# EAGLE board pcb (EAGLE 9.7.0)
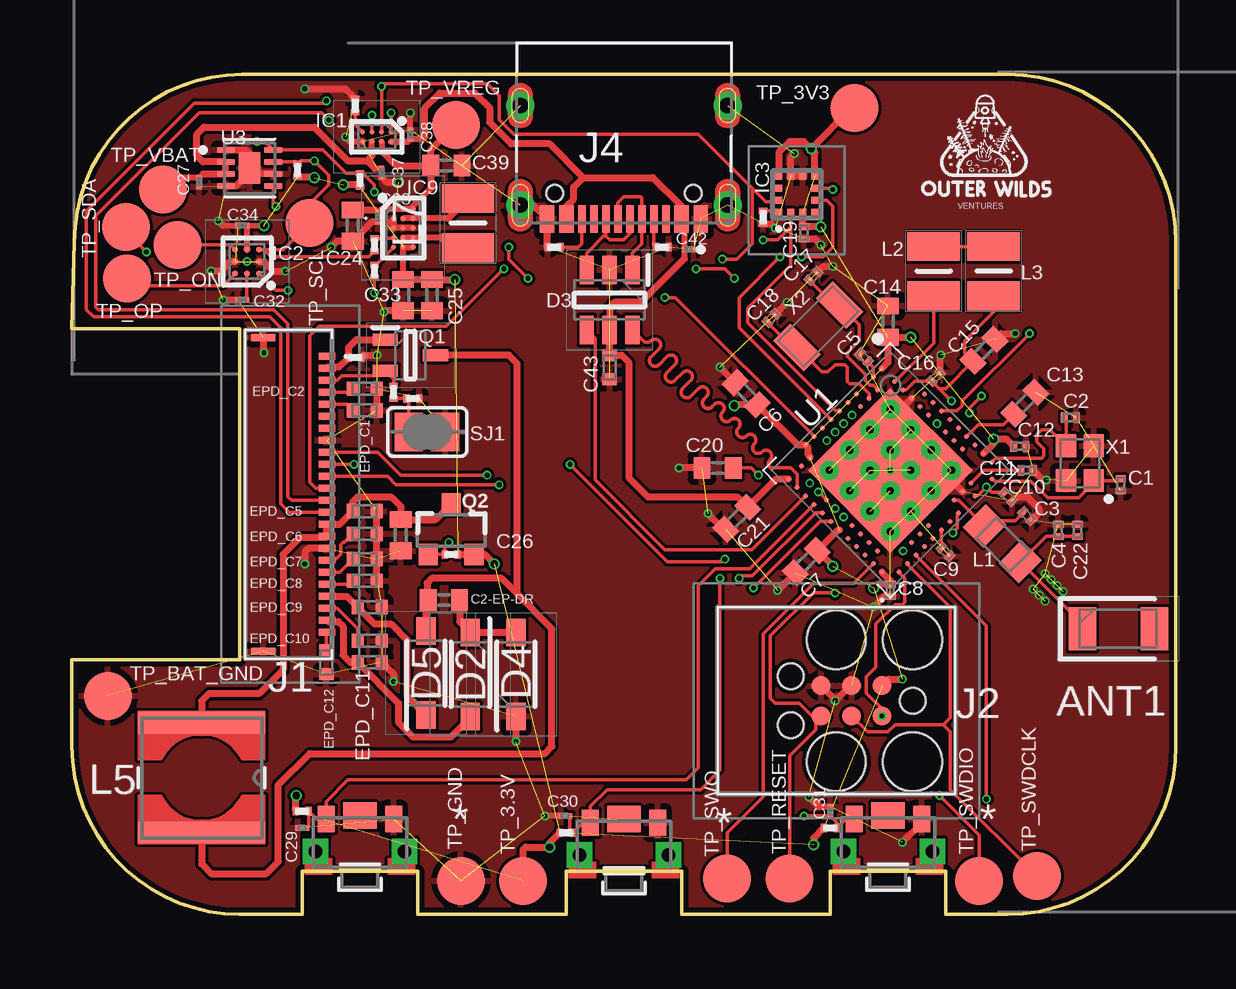
[diagram p0: board, top side]
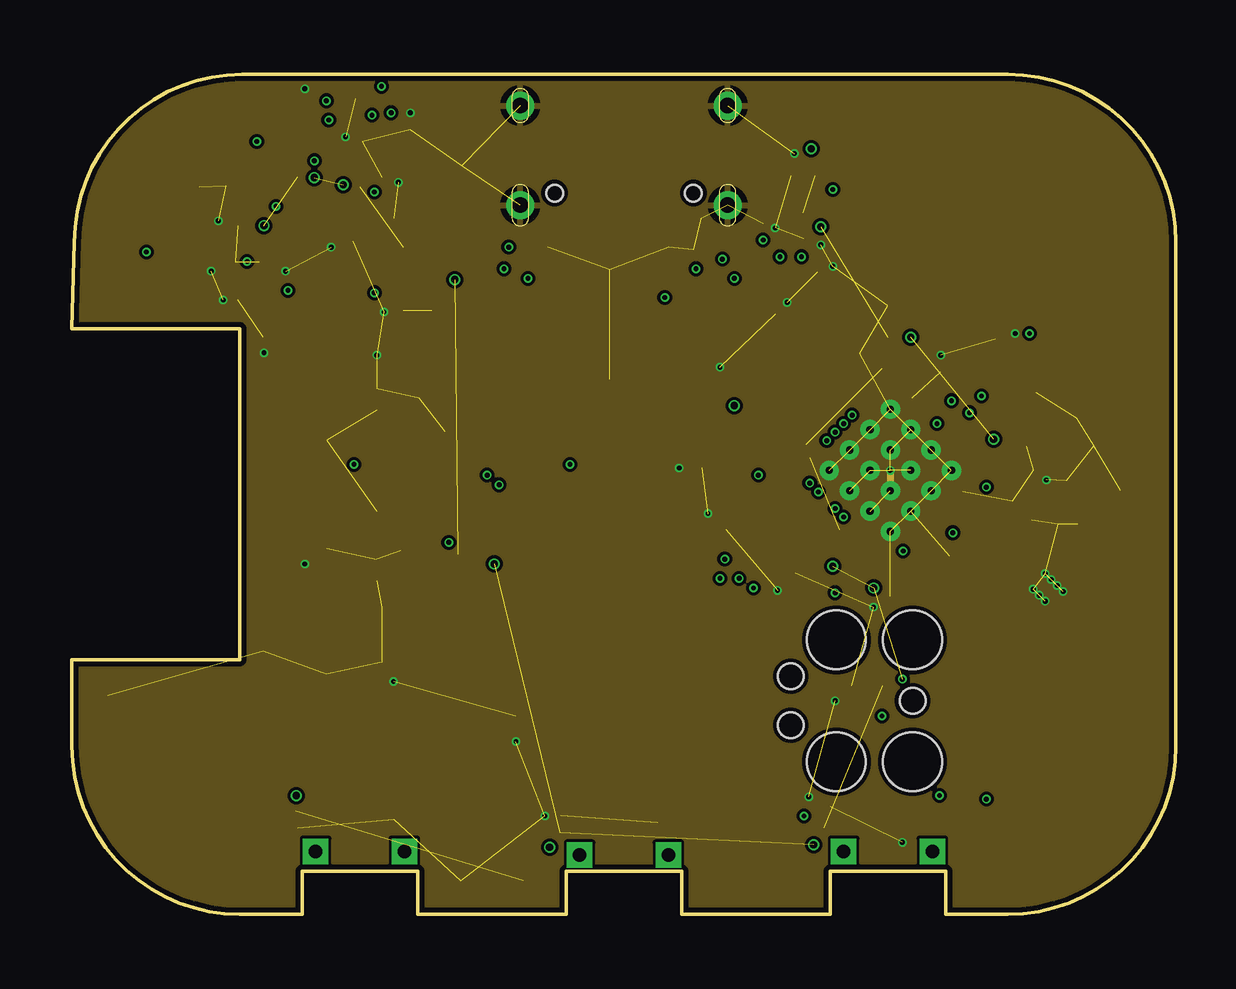
[diagram p1: board, inner layer Route2]
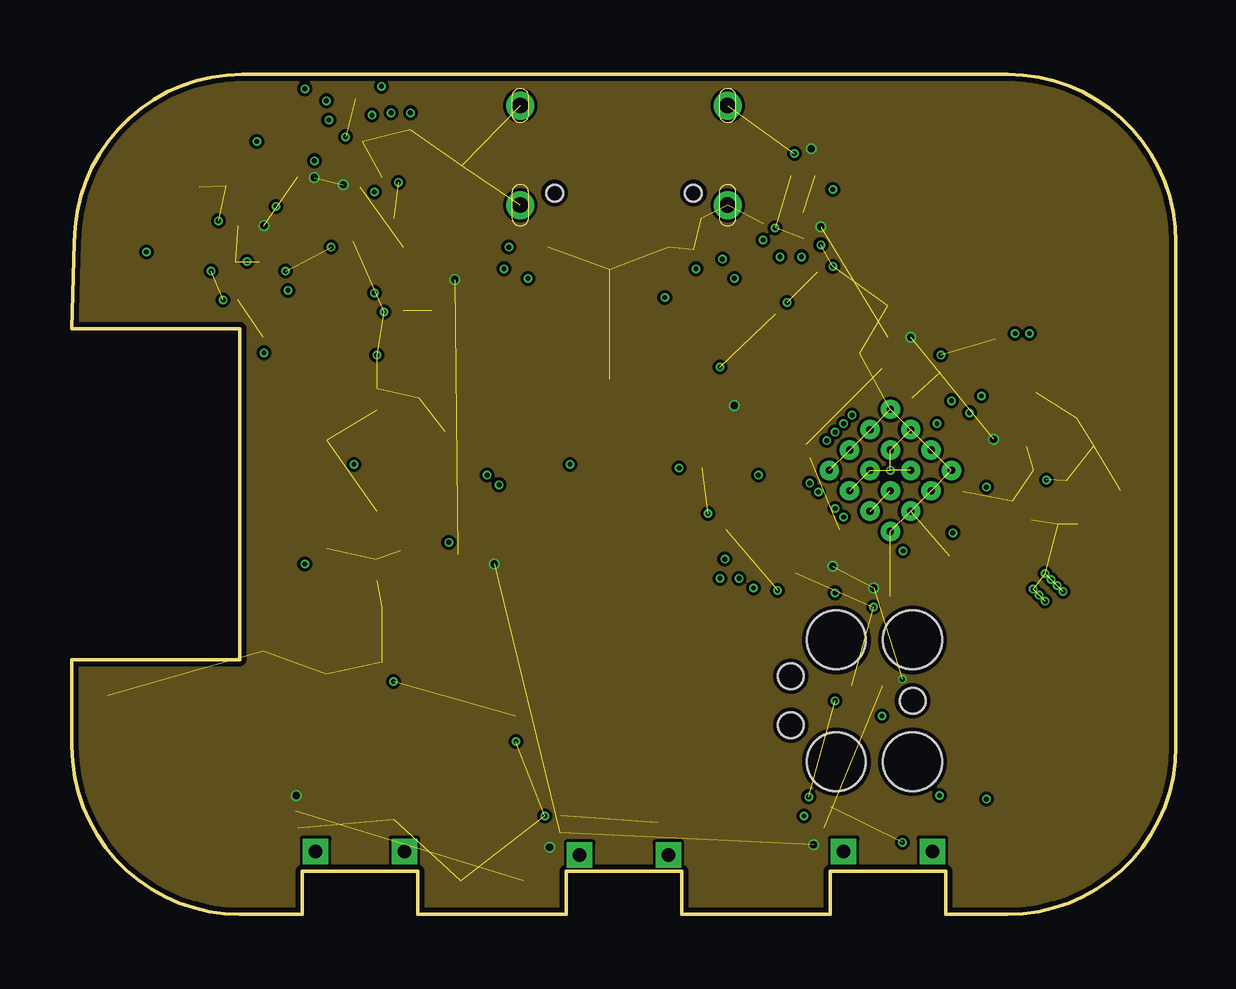
[diagram p2: board, inner layer Route15]
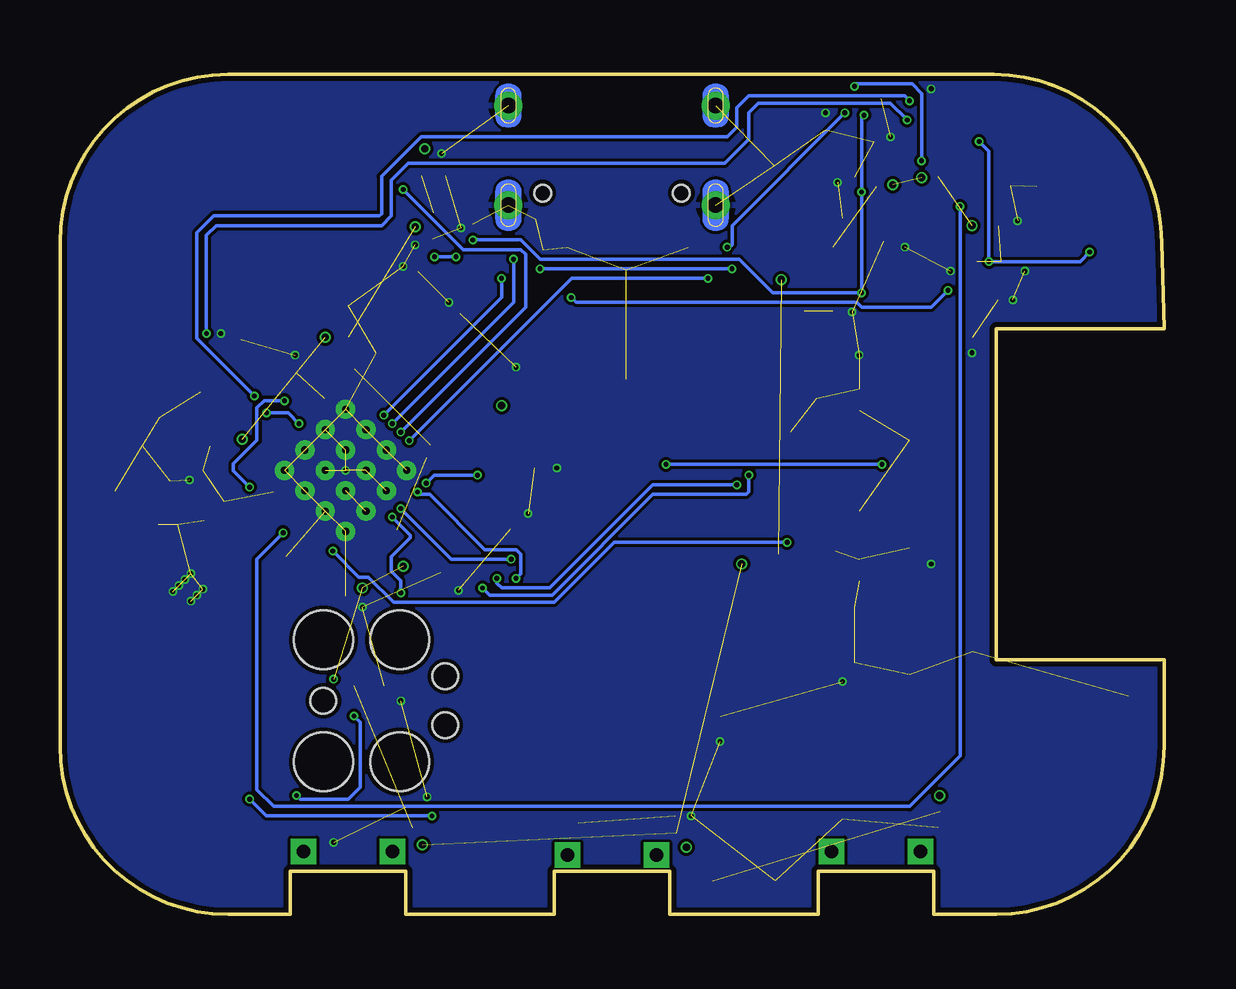
[diagram p3: board, bottom side, seen from below]

Size 46 x 35 mm. Coordinates in mm from the lower left corner, seen from the top.
Outline: 39,0 36.4,0 36.4,1.8 31.6,1.8 31.6,0 25.4,0 25.4,1.8 20.6,1.8 20.6,0 14.4,0 14.4,1.8 9.6,1.8 9.6,0 7,0 arc-90 0,7 0,10.6 7,10.6 7,24.4 0,24.4 0.1,28 arc-90 7.1,35 39,35 arc-90 46,28 46,7 arc-90 39,0
Copper layers (1+2*15+16): Top 0.035mm / dielectric 1.6mm / Route2 0.035mm / dielectric 0.15mm / Route15 0.035mm / dielectric 0.2mm / Bottom 0.035mm
Design rules "jlcpcb-2layers.dru *": minimum track width 5mil, minimum drill 0.2mm, track to track 5mil, track to pad 5mil, pad to pad 5mil, via to via 5mil, smd to smd 5mil, copper to edge 0.2mm, drill to drill 6mil, minimum pad ring 10mil, minimum via ring 3mil, stop-mask expansion 4mil, vias tented up to drill 999mm, thermal gap 10mil

## Footprints (pad centres in the part's own frame; a part is rotated, then mirrored left to right if it is on the bottom)
2450AT18B100E_ANTC3216X140N = smd 1.15 x 1.8: 1 -1.5,0; 2 1.5,0
NORDIC_NRF_3_RESC0201_L = smd 0.28 x 0.43: 1 -0.255,0; 2 0.255,0
ESP32_C6_LIBRARY_1_ESP32_WROVER_EAGLE-LTSPICE_C0402 = smd 0.7 x 0.9: 1 -0.65,0; 2 0.65,0
GRM011R60J152KE01L_2_CAPC0201X13N = smd 0.22 x 0.23: 1 -0.185,0; 2 0.185,0
NORDIC_NRF_3_RESC0402_L = smd 0.5 x 0.6: 1 -0.5,0; 2 0.5,0
ESP32_C6_LIBRARY_5_SOD3716X135N = smd 1.15 x 0.8: 1 -1.75,0; 2 1.75,0
ESP32_C6_LIBRARY_3_SOT95P280X145-6N = smd 1.2 x 0.6: 1 -1.25,0.95; 2 -1.25,0; 3 -1.25,-0.95; 4 1.25,-0.95; 5 1.25,0; 6 1.25,0.95
BQ25180YBGR_BGA8C40P2X4_100X155X50 = smd 0.2 x 0.2: A1 -0.2,0.6; A2 0.2,0.6; B1 -0.2,0.2; B2 0.2,0.2; C1 -0.2,-0.2; C2 0.2,-0.2; D1 -0.2,-0.6; D2 0.2,-0.6
DRV2605YZFR_BGA9C50P3X3_144X144X62 = smd 0.25 x 0.25: A1 -0.5,0.5; A2 0,0.5; A3 0.5,0.5; B1 -0.5,0; B2 0,0; B3 0.5,0; C1 -0.5,-0.5; C2 0,-0.5; C3 0.5,-0.5
BMA423_BMA423 = smd 0.3 x 0.35: 1 -0.75,-0.775; 2 -0.25,-0.775; 3 0.25,-0.775; 4 0.75,-0.775; 7 0.75,0.775; 8 0.25,0.775; 9 -0.25,0.775; 10 -0.75,0.775 | smd 0.35 x 0.3: 5 0.775,-0.25; 6 0.775,0.25; 11 -0.775,0.25; 12 -0.775,-0.25
RT6160AWSC_BGA15C40P3X5_140X230X60 = smd 0.216 x 0.216: A1 -0.4,0.8; A2 0,0.8; A3 0.4,0.8; B1 -0.4,0.4; B2 0,0.4; B3 0.4,0.4; C1 -0.4,0; C2 0,0; C3 0.4,0; D1 -0.4,-0.4; D2 0,-0.4; D3 0.4,-0.4; E1 -0.4,-0.8; E2 0,-0.8; E3 0.4,-0.8
503480-2400_5034802400 = smd 0.3 x 0.7: 1 -5.75,1.525; 2 -5.25,1.525; 3 -4.75,1.525; 4 -4.25,1.525; 5 -3.75,1.525; 6 -3.25,1.525; 7 -2.75,1.525; 8 -2.25,1.525; 9 -1.75,1.525; 10 -1.25,1.525; 11 -0.75,1.525; 12 -0.25,1.525; 13 0.25,1.525; 14 0.75,1.525; 15 1.25,1.525; 16 1.75,1.525; 17 2.25,1.525; 18 2.75,1.525; 19 3.25,1.525; 20 3.75,1.525; 21 4.25,1.525; 22 4.75,1.525; 23 5.25,1.525; 24 5.75,1.525 | smd 0.3 x 1: MP1 -6.54,-1.125; MP2 6.54,-1.125
TC2030-IDC_TC2030IDC = smd 0.783 x 0.783: 1 -0.953,-0.635; 2 -0.953,0.635; 3 0.317,-0.635; 4 0.317,0.635; 5 1.588,-0.635; 6 1.588,0.635 | hole 2.451: -2.223,-2.54; -2.223,2.54; 0.952,-2.54; 0.952,2.54 | hole 1.067: -2.223,0; 2.857,-1.016; 2.857,1.016
KH-TYPE-C-16P_KINGHELM_KH-TYPE-C-16P = smd 0.6 x 1.15: A1_B12 -3.2,4.725; A4_B9 -2.4,4.725; A9_B4 2.4,4.725; A12_B1 3.2,4.725 | smd 0.3 x 1.15: A5 -1.25,4.725; A6 -0.25,4.725; A7 0.25,4.725; A8 1.25,4.725; B5 1.75,4.725; B6 0.75,4.725; B7 -0.75,4.725; B8 -1.75,4.725 | drill 0.65 pad 1.05: SH1 -4.32,0; SH2 4.32,0; SH3 -4.32,4.15; SH4 4.32,4.15 | hole 0.7: -2.89,3.65; 2.89,3.65
NORDIC_NRF_2_RESC0805_N = smd 1.2 x 1.35: 1 -1.1,0; 2 1,0
MLP2016SR47MT0S1_INDC2016X100N = smd 1.2 x 2.2: 1 -1.028,0; 2 1.028,0
ESP32_C6_LIBRARY_2_IND_4828-WE-TPC_WRE = smd 0.9 x 5.3: 1 -2.286,0; 2 2.286,0
ESP32_C6_LIBRARY_6_SOT65P210X110-3N = smd 1.05 x 0.5: 1 -1.05,0.65; 2 -1.05,-0.65; 3 1.05,0
ESP32_C6_LIBRARY_4_ESP32_C6_LIBRARY_4_ESP32_C6_LIBRARY_4_ESP32_C6_LIBRARY_4_ESP32_WROVER_SPARKFUN-DISCRETESEMI_SOT23-3 = smd 0.8 x 0.9: 1 -0.95,-1; 2 0.95,-1; 3 0,1.1
CPF0201D7K68C1_0201 = smd 0.35 x 0.25: 1 0,0.275; 2 0,-0.275
ERA-1AEB3401C_0201 = smd 0.35 x 0.25: 1 0,0.275; 2 0,-0.275
ESP32_C6_LIBRARY_7_JUMPER_SJ = smd 1.168 x 1.6: 1 -0.762,0; 2 0.762,0
2025-10-22_07-23-44_LIBRARY_SW_EVP-AKE31A_PAN = smd 0.711 x 1.092: 1 -1.4,-0.972; 2 1.4,-0.972 | drill 0.559 pad 0.914 square: 3 -1.848,0.381; 4 1.848,0.381 | smd 1.397 x 1.092: 5 0,-1.124
HECTOR_WATCH_1_TP20R = smd 2 x 2: TP 0,0
NORDIC_NRF_4_AQFN50P700X700X85_HS-74N = smd 4.85 x 4.85: P$74 0,0 | drill 0.3 pad 0.6: P$75 -1.8,1.8; P$76 -0.6,1.8; P$77 0.6,1.8; P$78 1.8,1.8; P$79 -1.8,0.6; P$80 -0.6,0.6; P$81 0.6,0.6; P$82 1.8,0.6; P$83 -1.8,-0.6; P$84 -0.6,-0.6; P$85 0.6,-0.6; P$86 1.8,-0.6; P$87 -1.8,-1.8; P$88 -0.6,-1.8; P$89 0.6,-1.8; P$90 1.8,-1.8 | smd 0.2 x 0.2: P$A8 -1.25,3.25; P$A10 -0.75,3.25; P$A12 -0.25,3.25; P$A14 0.25,3.25; P$A16 0.75,3.25; P$A18 1.25,3.25; P$A20 1.75,3.25; P$A22 2.25,3.25; P$A23 2.75,3.25; P$AA24 3.25,-2.25; P$AB2 -2.75,-2.5; P$AC5 -2,-2.75; P$AC9 -1,-2.75; P$AC11 -0.5,-2.75; P$AC13 0,-2.75; P$AC15 0.5,-2.75; P$AC17 1,-2.75; P$AC19 1.5,-2.75; P$AC21 2,-2.75; P$AC24 3.25,-2.75; P$AD2 -2.75,-3.25; P$AD4 -2.25,-3.25; P$AD6 -1.75,-3.25; P$AD8 -1.25,-3.25; P$AD10 -0.75,-3.25; P$AD12 -0.25,-3.25; P$AD14 0.25,-3.25; P$AD16 0.75,-3.25; P$AD18 1.25,-3.25; P$AD20 1.75,-3.25; P$AD22 2.25,-3.25; P$AD23 2.75,-3.25; P$B1 -3.25,2.75; P$B3 -2.5,2.75; P$B5 -2,2.75; P$B7 -1.5,2.75; P$B9 -1,2.75; P$B11 -0.5,2.75; P$B13 0,2.75; P$B15 0.5,2.75; P$B17 1,2.75; P$B19 1.5,2.75; P$B24 3.25,2.75; P$C1 -3.25,2.25; P$D2 -2.75,2; P$D23 2.75,2; P$E24 3.25,1.75; P$F2 -2.75,1.5; P$F23 2.75,1.5; P$G1 -3.25,1.25; P$H2 -2.75,1; P$H23 2.75,1; P$J1 -3.25,0.75; P$J24 3.25,0.75; P$K2 -2.75,0.5; P$L1 -3.25,0.25; P$L24 3.25,0.25; P$M2 -2.75,0; P$N1 -3.25,-0.25; P$N24 3.25,-0.25; P$P2 -2.75,-0.5; P$P23 2.75,-0.5; P$R1 -3.25,-0.75; P$R24 3.25,-0.75; P$T2 -2.75,-1; P$T23 2.75,-1; P$U1 -3.25,-1.25; P$U24 3.25,-1.25; P$V23 2.75,-1.5; P$W1 -3.25,-1.75; P$W24 3.25,-1.75; P$Y2 -2.75,-2; P$Y23 2.75,-2
ESP32_C6_LIBRARY_SON50P200X200X80-9N = smd 0.76 x 0.27: 1 -0.985,0.75; 2 -0.985,0.25; 3 -0.985,-0.25; 4 -0.985,-0.75; 5 0.985,-0.75; 6 0.985,-0.25; 7 0.985,0.25; 8 0.985,0.75 | smd 0.9 x 1.3: 9 0,0
NORDIC_NRF_BT-XTAL_2016_N = smd 0.95 x 0.85: 1 -0.725,-0.575; 2 0.725,-0.575; 3 0.725,0.575; 4 -0.725,0.575
NORDIC_NRF_1_XTAL_3215_N = smd 1 x 1.8: 1 -1.25,0; 2 1.25,0

## Placement (x,y rotation side)
ANT1  2450AT18B100E  [2450AT18B100E_ANTC3216X140N]  43.6,11.9 0 top
C1  12pF  [NORDIC_NRF_3_RESC0201_L]  43.7,17.9 270 top
C2  12pF  [NORDIC_NRF_3_RESC0201_L]  41.6,20.7 0 top
C2-EP-DR  4.7uF/25V  [ESP32_C6_LIBRARY_1_ESP32_WROVER_EAGLE-LTSPICE_C0402]  15.5,13.1 180 top
C3  1pF  [NORDIC_NRF_3_RESC0201_L]  39.8,16.6 315 top
C4  1pF  [NORDIC_NRF_3_RESC0201_L]  41.1,16 90 top
C5  100nF  [NORDIC_NRF_3_RESC0201_L]  33,23.2 315 top
C6  4.7uF  [ESP32_C6_LIBRARY_1_ESP32_WROVER_EAGLE-LTSPICE_C0402]  28.1,21.7 135 top
C7  [ESP32_C6_LIBRARY_1_ESP32_WROVER_EAGLE-LTSPICE_C0402]  30.6,14.7 225 top
C8  [NORDIC_NRF_3_RESC0201_L]  34.1,13.5 270 top
C9  820pF N.C  [NORDIC_NRF_3_RESC0201_L]  36.4,15.1 315 top
C10  N.C.  [NORDIC_NRF_3_RESC0201_L]  39,17.4 315 top
C11  100pF  [NORDIC_NRF_3_RESC0201_L]  39.8,18.5 0 top
C12  100nF  [NORDIC_NRF_3_RESC0201_L]  39.5,19.5 0 top
C13  N.C.  [ESP32_C6_LIBRARY_1_ESP32_WROVER_EAGLE-LTSPICE_C0402]  39.7,21.3 45 top
C14  4.7uF  [ESP32_C6_LIBRARY_1_ESP32_WROVER_EAGLE-LTSPICE_C0402]  34,24.7 90 top
C15  1.0uF  [ESP32_C6_LIBRARY_1_ESP32_WROVER_EAGLE-LTSPICE_C0402]  38,23.5 45 top
C16  47nF  [NORDIC_NRF_3_RESC0201_L]  36,22.4 225 top
C17  12pF  [NORDIC_NRF_3_RESC0201_L]  30.9,26.6 225 top
C18  12pF  [NORDIC_NRF_3_RESC0201_L]  29.15,24.85 225 top
C19  100nF  [NORDIC_NRF_3_RESC0201_L]  30.5,28.4 270 top
C20  4.7uF  [ESP32_C6_LIBRARY_1_ESP32_WROVER_EAGLE-LTSPICE_C0402]  26.9,18.6 180 top
C21  [ESP32_C6_LIBRARY_1_ESP32_WROVER_EAGLE-LTSPICE_C0402]  27.7,16.5 225 top
C22  N.C.  [NORDIC_NRF_3_RESC0201_L]  41.9,16 90 top
C23  0.1uF  [GRM011R60J152KE01L_2_CAPC0201X13N]  12.75,29.05 90 top
C24  10uF  [ESP32_C6_LIBRARY_1_ESP32_WROVER_EAGLE-LTSPICE_C0402]  11.7,28.7 90 top
C25  22uF  [ESP32_C6_LIBRARY_1_ESP32_WROVER_EAGLE-LTSPICE_C0402]  15,25.8 270 top
C26  [ESP32_C6_LIBRARY_1_ESP32_WROVER_EAGLE-LTSPICE_C0402]  13.7,15.8 270 top
C27  0.1uF  [GRM011R60J152KE01L_2_CAPC0201X13N]  5.3,30.5 90 top
C29  1uF  [GRM011R60J152KE01L_2_CAPC0201X13N]  9.6,3.6 0 top
C30  1uF  [GRM011R60J152KE01L_2_CAPC0201X13N]  20.55,4.1 0 top
C31  1uF  [GRM011R60J152KE01L_2_CAPC0201X13N]  31.6,4.3 270 top
C32  1uF  [GRM011R60J152KE01L_2_CAPC0201X13N]  7.1,25.6 0 top
C33  22uF  [ESP32_C6_LIBRARY_1_ESP32_WROVER_EAGLE-LTSPICE_C0402]  13.8,25.8 270 top
C34  0.1uF  [GRM011R60J152KE01L_2_CAPC0201X13N]  7.1,28.7 0 top
C37  1uF  [GRM011R60J152KE01L_2_CAPC0201X13N]  12.9,30.9 90 top
C38  1uF  [GRM011R60J152KE01L_2_CAPC0201X13N]  14.1,32.5 270 top
C39  10uF  [ESP32_C6_LIBRARY_1_ESP32_WROVER_EAGLE-LTSPICE_C0402]  15.6,31.2 0 top
C42  0.1uF  [GRM011R60J152KE01L_2_CAPC0201X13N]  25.7,27.7 0 top
C43  4.7uF  [NORDIC_NRF_3_RESC0402_L]  22.4,22.8 270 top
D2  MBR0530  [ESP32_C6_LIBRARY_5_SOD3716X135N]  16.6,10 270 top
D3  USBLC6-2SC6Y  [ESP32_C6_LIBRARY_3_SOT95P280X145-6N]  22.4,25.6 270 top
D4  MBR0530  [ESP32_C6_LIBRARY_5_SOD3716X135N]  18.5,10 90 top
D5  MBR0530  [ESP32_C6_LIBRARY_5_SOD3716X135N]  14.75,10.05 90 top
EPD_C1  [NORDIC_NRF_3_RESC0402_L]  12.2,21 180 top
EPD_C2  [NORDIC_NRF_3_RESC0402_L]  12.2,21.9 180 top
EPD_C5  [NORDIC_NRF_3_RESC0402_L]  12.2,16.8 180 top
EPD_C6  [NORDIC_NRF_3_RESC0402_L]  12.2,15.85 180 top
EPD_C7  [NORDIC_NRF_3_RESC0402_L]  12.2,14.8 180 top
EPD_C8  [NORDIC_NRF_3_RESC0402_L]  12.2,13.9 180 top
EPD_C9  [NORDIC_NRF_3_RESC0402_L]  12.4,12.8 180 top
EPD_C10  [NORDIC_NRF_3_RESC0402_L]  12.4,11.4 180 top
EPD_C11  [NORDIC_NRF_3_RESC0402_L]  12.4,10.5 180 top
EPD_C12  [NORDIC_NRF_3_RESC0402_L]  10.6,10.5 90 top
IC1  BQ25180YBGR_BQ25180YBGR  [BQ25180YBGR_BGA8C40P2X4_100X155X50]  12.7,32.4 270 top
IC2  DRV2605YZFR  [DRV2605YZFR_BGA9C50P3X3_144X144X62]  7.3,27.2 180 top
IC3  BMA423_BMA423  [BMA423_BMA423]  30.2,30 0 top
IC9  RT6160AWSC_RT6160AWSC  [RT6160AWSC_BGA15C40P3X5_140X230X60]  13.8,28.6 0 top
J1  503480-2400_503480-2400  [503480-2400_5034802400]  9.1,17.5 270 top
J2  TC2030-IDC_TC2030-IDC  [TC2030-IDC_TC2030IDC]  32.8,8.9 180 top
J4  KH-TYPE-C-16P_KH-TYPE-C-16P  [KH-TYPE-C-16P_KINGHELM_KH-TYPE-C-16P]  23,33.7 180 top
L1  3.9nH  [NORDIC_NRF_2_RESC0805_N]  38.8,15.4 315 top
L2  10uH  [MLP2016SR47MT0S1_INDC2016X100N]  35.9,26.8 90 top
L3  15nH  [MLP2016SR47MT0S1_INDC2016X100N]  38.4,26.8 270 top
L5  68uH  [ESP32_C6_LIBRARY_2_IND_4828-WE-TPC_WRE]  5.4,5.7 270 top
L7  MLP2016SR47MT0S1_FTC252012SR47MBCA  [MLP2016SR47MT0S1_INDC2016X100N]  16.5,28.8 270 top
Q1  SI1308EDL-T1-GE3  [ESP32_C6_LIBRARY_6_SOT65P210X110-3N]  14.1,23.3 0 top
Q2  20V/4.2A/52mΩ/1.4W  [ESP32_C6_LIBRARY_4_ESP32_C6_LIBRARY_4_ESP32_C6_LIBRARY_4_ESP32_C6_LIBRARY_4_ESP32_WROVER_SPARKFUN-DISCRETESEMI_SOT23-3]  15.8,16 0 top
R1_EP_DR  0.47  [CPF0201D7K68C1_0201]  13.4,21.75 180 top
R1_USB  5k1  [ERA-1AEB3401C_0201]  24.6,27.8 270 top
R2  0  [CPF0201D7K68C1_0201]  12.6,26.8 0 top
R2_EP_DR  10k  [CPF0201D7K68C1_0201]  11.8,23.2 270 top
R2_USB  5k1  [ERA-1AEB3401C_0201]  20.1,27.8 270 top
R3  0  [CPF0201D7K68C1_0201]  28.8,29.05 0 top
R4  0  [CPF0201D7K68C1_0201]  12.6,27.9 0 top
R5  10k  [ERA-1AEB3401C_0201]  9.6,4.3 270 top
R7  10k  [ERA-1AEB3401C_0201]  31.6,3.6 270 top
R8  10k  [ERA-1AEB3401C_0201]  20.6,3.4 270 top
R9  10k  [CPF0201D7K68C1_0201]  11.8,33.7 0 top
R17  3k3  [CPF0201D7K68C1_0201]  9.4,31 180 top
R18  3k3  [CPF0201D7K68C1_0201]  12,30.6 180 top
R_PWR_EPD  10k  [CPF0201D7K68C1_0201]  15.8,15 90 top
R_TYPE_SEL  2.2  [CPF0201D7K68C1_0201]  14.2,21.5 270 top
SJ1  [ESP32_C6_LIBRARY_7_JUMPER_SJ]  14.8,20.1 180 top
SW_DN  2025-10-22_07-23-44_LIBRARY_EVP-AKE31ASW_EVP-AKE31A_PAN  [2025-10-22_07-23-44_LIBRARY_SW_EVP-AKE31A_PAN]  34,3 180 top
SW_ENT  2025-10-22_07-23-44_LIBRARY_EVP-AKE31ASW_EVP-AKE31A_PAN  [2025-10-22_07-23-44_LIBRARY_SW_EVP-AKE31A_PAN]  23,2.85 180 top
SW_UP  2025-10-22_07-23-44_LIBRARY_EVP-AKE31ASW_EVP-AKE31A_PAN  [2025-10-22_07-23-44_LIBRARY_SW_EVP-AKE31A_PAN]  12,3 180 top
TP_3.3V  HECTOR_WATCH_1_TPTP20R  [HECTOR_WATCH_1_TP20R]  18.8,1.4 0 top
TP_3V3  TP_3V3  [HECTOR_WATCH_1_TP20R]  32.6,33.6 0 top
TP_BAT_GND  HECTOR_WATCH_1_TPTP20R  [HECTOR_WATCH_1_TP20R]  1.5,9.1 0 top
TP_GND  HECTOR_WATCH_1_TPTP20R  [HECTOR_WATCH_1_TP20R]  16.2,1.4 0 top
TP_ON  HECTOR_WATCH_1_TPTP20R  [HECTOR_WATCH_1_TP20R]  4.4,27.9 0 top
TP_OP  HECTOR_WATCH_1_TPTP20R  [HECTOR_WATCH_1_TP20R]  2.3,26.5 0 top
TP_RESET  HECTOR_WATCH_1_TPTP20R  [HECTOR_WATCH_1_TP20R]  29.9,1.5 0 top
TP_SCL  [HECTOR_WATCH_1_TP20R]  9.9,28.8 0 top
TP_SDA  HECTOR_WATCH_1_TPTP20R  [HECTOR_WATCH_1_TP20R]  2.25,28.65 0 top
TP_SWDCLK  HECTOR_WATCH_1_TPTP20R  [HECTOR_WATCH_1_TP20R]  40.2,1.6 180 top
TP_SWDIO  HECTOR_WATCH_1_TPTP20R  [HECTOR_WATCH_1_TP20R]  37.8,1.4 0 top
TP_SWO  HECTOR_WATCH_1_TPTP20R  [HECTOR_WATCH_1_TP20R]  27.3,1.5 0 top
TP_VBAT  HECTOR_WATCH_1_TPTP20R  [HECTOR_WATCH_1_TP20R]  3.8,30.2 0 top
TP_VREG  HECTOR_WATCH_1_TPTP20R  [HECTOR_WATCH_1_TP20R]  16,32.9 0 top
U1  NRF52840_QF  [NORDIC_NRF_4_AQFN50P700X700X85_HS-74N]  34.1,18.5 315 top
U3  MAX17048G+T10  [ESP32_C6_LIBRARY_SON50P200X200X80-9N]  7.4,31.1 0 top
X1  [NORDIC_NRF_BT-XTAL_2016_N]  42,18.8 90 top
X2  32.768kHz  [NORDIC_NRF_1_XTAL_3215_N]  31.1,24.5 225 top

## Library data of the parts
ANT1 = InkTime_v5; ARROW_PART_NUMBER: 2450AT18B100E; ARROW_PRICE-STOCK: https://www.arrow.com/en/products/2450at18b100e/johanson-dielectrics?utm_currency=USD&region=nac; DESCRIPTION: Antennas 2.45GHz ANTENNA; HEIGHT: 1.4mm; MANUFACTURER_NAME: JOHANSON TECHNOLOGY; MANUFACTURER_PART_NUMBER: 2450AT18B100E; MOUSER_PART_NUMBER: 609-2450AT18B100E; MOUSER_PRICE-STOCK: https://www.mouser.co.uk/ProductDetail/Johanson-Technology/2450AT18B100E?qs=yCnrNFeXz%252Bh5MFsFIXGZGA%3D%3D
C1-C5 C8-C12 C16-C19 C22 C43 EPD_C1 EPD_C2 EPD_C5-EPD_C12 L1 R1_EP_DR R1_USB R2 R2_EP_DR R2_USB R3-R5 R7-R9 R17 R18 R_PWR_EPD R_TYPE_SEL SJ1 TP_3.3V TP_3V3 TP_BAT_GND TP_GND TP_ON TP_OP TP_RESET TP_SCL TP_SDA TP_SWDCLK TP_SWDIO TP_SWO TP_VBAT TP_VREG U1 X1 X2 = InkTime_v5
C2-EP-DR C6 C7 C13-C15 C20 C21 C24-C26 C33 C39 = InkTime_v5; SPICEMODEL: NONE; SPICEPREFIX: C
C23 C27 C29-C32 C34 C37 C38 C42 = InkTime_v5; AVAILABILITY: In Stock; CHECK_PRICES: https://www.snapeda.com/parts/GRM011R60J152KE01L/Murata/view-part/?ref=eda; DESCRIPTION: SMD Capacitor X5R(EIA) with Capacitance: 1500pF Tol. 10%. Rated Voltage: 6.3Vdc; MF: Murata; MP: GRM011R60J152KE01L; PACKAGE: 0201 Murata; PRICE: None; SNAPEDA_LINK: https://www.snapeda.com/parts/GRM011R60J152KE01L/Murata/view-part/?ref=snap
D2 D4 D5 = InkTime_v5; AVAILABILITY: In Stock; CHECK_PRICES: https://www.snapeda.com/parts/MBR0530/Onsemi/view-part/?ref=eda; DESCRIPTION: Diode Schottky 30 V 500mA Surface Mount SOD-123; MF: ON Semiconductor; MP: MBR0530; PACKAGE: SOD-123-2 ON Semiconductor; PRICE: None; PURCHASE-URL: https://www.snapeda.com/api/url_track_click_mouser/?unipart_id=179458&manufacturer=ON Semiconductor&part_name=MBR0530&search_term=None; SNAPEDA_LINK: https://www.snapeda.com/parts/MBR0530/Onsemi/view-part/?ref=snap
D3 = InkTime_v5; AVAILABILITY: In Stock; CHECK_PRICES: https://www.snapeda.com/parts/USBLC6-2SC6Y/STMicroelectronics/view-part/?ref=eda; DESCRIPTION: 17V Clamp 5A (8/20µs) Ipp Tvs Diode Surface Mount SOT-23-6; MF: STMicroelectronics; MP: USBLC6-2SC6Y; PACKAGE: SOT-23-6 STMicroelectronics; PRICE: None; SNAPEDA_LINK: https://www.snapeda.com/parts/USBLC6-2SC6Y/STMicroelectronics/view-part/?ref=snap
IC1 = InkTime_v5; ARROW_PART_NUMBER: BQ25180YBGR; ARROW_PRICE-STOCK: https://www.arrow.com/en/products/bq25180ybgr/texas-instruments?utm_currency=USD&region=nac; DESCRIPTION: Charger IC Lithium Ion/Polymer, Lithium Iron Phosphate 8-DSBGA (1.6x1.1); HEIGHT: 0.5mm; MANUFACTURER_NAME: Texas Instruments; MANUFACTURER_PART_NUMBER: BQ25180YBGR; MOUSER_PART_NUMBER: 595-BQ25180YBGR; MOUSER_PRICE-STOCK: https://www.mouser.co.uk/ProductDetail/Texas-Instruments/BQ25180YBGR?qs=doiCPypUmgEWjAK%252BJAX6Tw%3D%3D
IC2 = InkTime_v5; ARROW_PART_NUMBER: DRV2605YZFR; ARROW_PRICE-STOCK: https://www.arrow.com/en/products/drv2605yzfr/texas-instruments?region=nac; DESCRIPTION: Haptic Driver for ERM/LRA with Built-In Library and Smart Loop Architecture; HEIGHT: 0.625mm; MANUFACTURER_NAME: Texas Instruments; MANUFACTURER_PART_NUMBER: DRV2605YZFR
IC3 = InkTime_v5; ARROW_PART_NUMBER: BMA423; ARROW_PRICE-STOCK: https://www.arrow.com/en/products/bma423/bosch; DESCRIPTION: Accelerometers Triaxial low-g 12bit Acceleration Sensor; HEIGHT: 1mm; MANUFACTURER_NAME: BOSCH; MANUFACTURER_PART_NUMBER: BMA423; MOUSER_PART_NUMBER: 262-BMA423; MOUSER_PRICE-STOCK: https://www.mouser.co.uk/ProductDetail/Bosch-Sensortec/BMA423?qs=HXFqYaX1Q2xC%252BSgeGoX3mg%3D%3D
IC9 = InkTime_v5; DESCRIPTION: Buck-Boost Regulator Positive Output Step-Up/Step-Down I2C DC-DC Controller IC 15-WL-CSP (BSC) (1.4x2.3); HEIGHT: 0.6mm; MANUFACTURER_NAME: RICHTEK; MANUFACTURER_PART_NUMBER: RT6160AWSC; MOUSER_PART_NUMBER: 835-RT6160AWSC; MOUSER_PRICE-STOCK: https://www.mouser.co.uk/ProductDetail/Richtek/RT6160AWSC?qs=amGC7iS6iy%2FLd9PSoixZXQ%3D%3D
J1 = InkTime_v5; DESCRIPTION: FFC & FPC Connectors 0.5mm FPC RA SMT Dual Contact 24Ckt; HEIGHT: 1.87mm; MANUFACTURER_NAME: Molex; MANUFACTURER_PART_NUMBER: 503480-2400; MOUSER_PART_NUMBER: 538-503480-2400; MOUSER_PRICE-STOCK: https://www.mouser.co.uk/ProductDetail/Molex/503480-2400?qs=OAhjpuo3Vu7efIoxFh9AOw%3D%3D
J2 = InkTime_v5; DESCRIPTION: CABLE ADAPTER 6 POS; HEIGHT: 19mm; MANUFACTURER_NAME: Tag Connect; MANUFACTURER_PART_NUMBER: TC2030-IDC
J4 = InkTime_v5; AVAILABILITY: Not in stock; CHECK_PRICES: https://www.snapeda.com/parts/KH-TYPE-C-16P/Kinghelm/view-part/?ref=eda; MF: kinghelm; MP: KH-TYPE-C-16P; PACKAGE: None; PRICE: None; SNAPEDA_LINK: https://www.snapeda.com/parts/KH-TYPE-C-16P/Kinghelm/view-part/?ref=snap
L2 L3 L7 = InkTime_v5; DESCRIPTION: SMD / SMT Inductors (Coils), L=0.47?H, L x W x T :; HEIGHT: 1mm; JLCPCB: https://jlcpcb.com/partdetail/6763488-FTC252012SR47MBCA/C5832368; MANUFACTURER_NAME: TDK; MANUFACTURER_PART_NUMBER: FTC252012SR47MBCA
L5 = InkTime_v5; COPYRIGHT: Copyright (C) 2024 Ultra Librarian. All rights reserved.; MANUFACTURER_PART_NUMBER: 744043680; MFR_NAME: Wurth Electronics
Q1 = InkTime_v5; AVAILABILITY: In Stock; CHECK_PRICES: https://www.snapeda.com/parts/SI1308EDL-T1-GE3/Vishay+Siliconix/view-part/?ref=eda; DESCRIPTION: Si1308EDL-T1-GE3 N-channel MOSFET Transistor, 1.5 A, 30 V, 3-Pin SC-70 | Siliconix / Vishay SI1308EDL-T1-GE3; MF: Vishay Siliconix; MP: SI1308EDL-T1-GE3; PACKAGE: SOT-323 Vishay Semiconductor; PRICE: None; PURCHASE-URL: https://www.snapeda.com/api/url_track_click_mouser/?unipart_id=274603&manufacturer=Vishay Siliconix&part_name=SI1308EDL-T1-GE3&search_term=None; SNAPEDA_LINK: https://www.snapeda.com/parts/SI1308EDL-T1-GE3/Vishay+Siliconix/view-part/?ref=snap
Q2 = InkTime_v5; PROD_ID: TRAN-14388
SW_DN SW_ENT SW_UP = InkTime_v5; COPYRIGHT: Copyright (C) 2025 Ultra Librarian. All rights reserved.; DIGI-KEY_PART_NUMBER_1: P123437TR-ND; DIGI-KEY_PART_NUMBER_2: P123437CT-ND; DIGI-KEY_PART_NUMBER_3: P123437DKR-ND; MANUFACTURER_NAME: Panasonic; MANUFACTURER_PART_NUMBER: EVP-AKE31A
U3 = InkTime_v5; AVAILABILITY: In Stock; CHECK_PRICES: https://www.snapeda.com/parts/MAX17048G+T10/Analog+Devices/view-part/?ref=eda; DESCRIPTION: 3µA 1-Cell/2-Cell Fuel Gauge with ModelGauge; MF: Analog Devices; MP: MAX17048G+T10; PACKAGE: TDFN-8 Maxim; PRICE: None; PURCHASE-URL: https://www.snapeda.com/api/url_track_click_mouser/?unipart_id=329239&manufacturer=Analog Devices&part_name=MAX17048G+T10&search_term=None; SNAPEDA_LINK: https://www.snapeda.com/parts/MAX17048G+T10/Analog+Devices/view-part/?ref=snap

## Nets
3V3: C6.1 C7.1 C8.1 C12.1 C14.1 C19.1 C25.1 C33.1 C34.2 IC2.C2 IC3.3 IC3.7 IC3.10 IC9.E2 IC9.E3 J2.1 Q2.2 R5.2 R7.2 R8.2 R17.1 R18.1 R_PWR_EPD.2 TP_3.3V.TP TP_3V3.TP U1.P$A22 U1.P$AD14 U1.P$AD23 U1.P$B1 U1.P$W1 U1.P$Y2
ALERT: U1.P$J24 U3.5
D+: D3.4 U1.P$AD6
D-: D3.6 U1.P$AD4
DEC1: C5.2 U1.P$C1
DEC3: C11.1 U1.P$D23
DEC4_6: C10.1 C15.1 C16.2 L3.2 U1.P$B5 U1.P$E24
DN: D3.1 J4.A7 J4.B7
DP: D3.3 J4.A6 J4.B6
EPD_3V3: C26.1 EPD_C5.2 J1.15 J1.16 L5.1 Q2.3
EPD_BUSY: J1.9 U1.P$AD12
EPD_CS: J1.12 U1.P$K2
EPD_DC: J1.11 U1.P$AD10
EPD_RST: J1.10 U1.P$AC11
GDR: J1.2 Q1.1 R2_EP_DR.2
GND: C1.2 C2.2 C3.2 C4.2 C5.1 C6.2 C7.2 C8.2 C9.2 C10.2 C11.2 C12.2 C13.2 C14.2 C15.2 C16.1 C17.1 C18.1 C19.2 C20.2 C21.2 C22.2 C23.1 C24.1 C25.2 C26.2 C27.1 C29.1 C30.1 C31.1 C32.1 C33.2 C34.1 C37.1 C38.1 C39.2 C42.2 C43.2 D3.2 D4.1 EPD_C1.1 EPD_C2.1 EPD_C5.1 EPD_C6.1 EPD_C7.1 EPD_C8.1 EPD_C9.1 EPD_C10.1 EPD_C11.1 EPD_C12.1 IC1.D2 IC2.B1 IC2.B3 IC3.8 IC3.9 IC9.B1 IC9.C1 IC9.C2 IC9.C3 J1.8 J1.17 J1.MP1 J1.MP2 J2.3 J2.5 J4.A1_B12 J4.A12_B1 J4.SH1 J4.SH2 J4.SH3 J4.SH4 R1_USB.1 R2_EP_DR.1 R2_USB.2 R3.2 R9.1 R_TYPE_SEL.1 SJ1.1 SW_DN.1 SW_ENT.1 SW_UP.1 TP_BAT_GND.TP TP_GND.TP U1.P$74 U1.P$75 U1.P$76 U1.P$77 U1.P$78 U1.P$79 U1.P$80 U1.P$81 U1.P$82 U1.P$83 U1.P$84 U1.P$85 U1.P$86 U1.P$87 U1.P$88 U1.P$89 U1.P$90 U1.P$B7 U1.P$F23 U3.1 U3.4 U3.6 U3.9 X1.2 X1.4
HAPTIC_EN: IC2.A1 U1.P$U1
IMU_INT1: IC3.5 U1.P$N1
IMU_INT2: IC3.6 U1.P$P2
LX1: IC9.B2 IC9.B3 L7.1
LX2: IC9.D2 IC9.D3 L7.2
MOSI: J1.14 U1.P$B13
N$1: C2.1 U1.P$A23 X1.3
N$2: IC3.1 R3.1
N$3: C1.1 U1.P$B24 X1.1
N$4: C3.1 L1.1 U1.P$H23
N$5: IC1.D1 R9.2
N$6: L2.2 L3.1
N$7: L2.1 U1.P$B3
N$8: EPD_C2.2 J1.4
N$9: IC9.D1 R4.1
N$10: C13.1 U1.P$A18
N$11: C9.1 U1.P$N24
N$12: IC9.E1 R2.1
N$13: C2-EP-DR.2 D5.2 L5.2 Q1.3
N$14: C2-EP-DR.1 D2.1 D4.2
N$15: EPD_C1.2 J1.5
N$16: C32.2 IC2.A2
N$17: J4.A5 R1_USB.2
N$21: C20.1 U1.P$AC5
N$25: R1_EP_DR.1 R_TYPE_SEL.2 SJ1.2
N$30: J4.B5 R2_USB.1
N$32: EPD_C6.2 J1.18
N$33: EPD_C7.2 J1.19
N$34: EPD_C12.2 J1.24
N$36: EPD_C10.2 J1.22
N$38: EPD_C8.2 J1.20
OUT+: IC2.A3 TP_OP.TP
OUT-: IC2.C3 TP_ON.TP
P0.00: C17.2 U1.P$D2 X2.1
P0.01: C18.2 U1.P$F2 X2.2
P0.04: U1.P$J1
P0.09: U1.P$L24
P0.13: C29.2 R5.1 SW_UP.2 U1.P$AD8
P0.14: C30.2 R8.1 SW_ENT.2 U1.P$AC9
P0.19: U1.P$AC15
P0.20: U1.P$AD16
P0.21: U1.P$AC17
P0.22: U1.P$AD18
P0.23: U1.P$AC19
P0.24: U1.P$AD20
P0.25: U1.P$AC21
P0.26: U1.P$G1
P0.27: U1.P$H2
P0.28: U1.P$B11
P0.29: U1.P$A10
P0.30: U1.P$B9
P0.31: U1.P$A8
P1.01: Q2.1 R_PWR_EPD.1 U1.P$Y23
P1.02: C31.2 R7.1 SW_DN.2 U1.P$W24
P1.03: U1.P$V23
P1.04: U1.P$U24
P1.05: U1.P$T23
P1.06: U1.P$R24
P1.07: U1.P$P23
P1.09: U1.P$R1
P1.10: U1.P$A20
P1.11: U1.P$B19
P1.12: U1.P$B17
P1.13: U1.P$A16
P1.14: U1.P$B15
P1.15: U1.P$A14
PMIC_INT: IC1.A1 U1.P$T2
PREVGH: D5.1 EPD_C9.2 J1.21
PREVGL: D2.2 EPD_C11.2 J1.23
RESE: J1.3 Q1.2 R1_EP_DR.2
RESET: J2.6 TP_RESET.TP U1.P$AC13
RF: ANT1.1 C4.1 C22.1 L1.2
SCK: J1.13 U1.P$A12
SCL: IC1.B1 IC2.C1 IC3.12 R4.2 R17.2 TP_SCL.TP U1.P$M2 U3.7
SDA: IC1.C1 IC2.B2 IC3.2 R2.2 R18.2 TP_SDA.TP U1.P$L1 U3.8
SWDCLK: J2.4 TP_SWDCLK.TP U1.P$AA24
SWDIO: J2.2 TP_SWDIO.TP U1.P$AC24
SWO: TP_SWO.TP U1.P$AD22
VBAT: C27.2 C37.2 IC1.C2 TP_VBAT.TP U3.2 U3.3
VBUS: C21.1 C38.2 C42.1 C43.1 D3.5 IC1.A2 J4.A4_B9 J4.A9_B4 U1.P$AD2
VREG: C23.2 C24.2 C39.1 IC1.B2 IC9.A1 IC9.A2 IC9.A3 TP_VREG.TP

## Tracks (layer width: path | path; a pad name or v marks a point on that pad's centre or on a via)
3V3  (via drill 0.2, 0.3)  (15 unrouted)
  Top 0.23: v8,28.7 C34.2
  Top 0.25: C34.2 7.29,27.71
  Top 0.26: C33.1 IC9.E2 IC9.E3
  Top 0.3: C33.1 C25.1 v15.95,26.45 | 7.29,27.71 IC2.C2 | U1.P$AD14 31.93,16.02 C7.1 31.7,14.52 v31.7,14.5 | R_PWR_EPD.2 Q2.2 17.2,15 v17.6,14.6 | R8.2 19.9,2.97 v19.9,2.8 18.9,2.8 18.8,2.7 TP_3.3V.TP | R5.2 9.32,4.93 v9.35,4.95 | IC3.7 30.95,31.75 v30.8,31.9 | v30.8,31.9 32.5,33.6 TP_3V3.TP | v30.8,31.9 30.5,32.2 29.9,32.2 29.45,31.75 IC3.10 | R7.2 30.9,3.18 v30.9,2.9 | C12.1 38.95,19.8 v38.4,19.8 38.4,19.62 U1.P$A22 | v34.95,24.05 C14.1 34,23 U1.P$B1 | v27.6,21.2 27.64,21.24 C6.1 30.24,19.56 U1.P$W1 30.66,19.46 30.66,19.16 30.74,19.08 U1.P$Y2 | v33.4,13.6 33.55,13.75 C8.1 34.1,13.9 U1.P$AD23 | v31.2,28.65 v31.2,28.66 C19.1 30.45,28.7 IC3.3 | R17.1 10.07,30.73 v10.1,30.7 | R18.1 11.93,30.4 v11.3,30.4 | J2.1 34.02,9.8 v34.6,9.8
  pour Route15: -0.07,-10.82 55.97,-10.82 62.22,-4.57 62.22,41.12 -10.17,41.12 -10.62,40.67 -10.62,-0.27
ALERT  (via drill 0.2)
  Top 0.152: U3.5 8.38,29.62 v8.5,29.5 | v36.7,15.9 36.88,16.08 36.88,16.68 U1.P$J24
  Bottom 0.152: v8.5,29.5 8.5,6.6 10.6,4.5 37.1,4.5 37.8,5.2 37.8,14.8 v36.7,15.9
D+
  Top 0.15: D3.4 21.8,24 21.8,18.1 24.7,15.2 28.32,15.2 U1.P$AD6
D-
  Top 0.15: 23.4,24.3 D3.6 23.8,23.9 arc90 24.13,23.9 arc-90 24.46,23.9 arc-90 24.46,23.57 24.13,23.24 arc90 24.13,22.91 arc90 24.46,22.91 24.79,23.24 arc-90 25.12,23.24 arc-90 25.12,22.91 24.79,22.58 arc90 24.79,22.25 arc90 25.12,22.25 25.45,22.58 arc-90 25.78,22.58 arc-90 25.78,22.25 25.45,21.92 arc90 25.45,21.59 arc90 25.78,21.59 26.11,21.92 arc-90 26.45,21.92 arc-90 26.45,21.59 26.34,21.48 arc90 26.34,21.15 arc90 26.67,21.15 26.77,21.25 arc-90 27.11,21.25 arc-90 27.11,20.93 arc90 27.11,20.59 arc90 27.44,20.59 arc-90 27.77,20.59 arc-90 27.77,20.26 arc90 27.77,19.93 arc90 28.1,19.93 arc-90 28.43,19.93 arc-90 28.43,19.6 arc90 28.43,19.27 arc90 28.76,19.27 arc-90 29.09,19.27 arc-90 29.09,18.94 arc90 29.09,18.61 29.1,18.6 29.95,18.6 30.21,18.34 U1.P$AD4
DEC1
  Top 0.152: C5.2 33.39,22.81 U1.P$C1
DEC3
  Top 0.152: C11.1 37.99,18.5 U1.P$D23
DEC4_6  (via drill 0.2)
  Top 0.15: U1.P$E24 37.74,17.44 v38.1,17.8 38.32,17.58 C10.1
  Top 0.152: 36.14,21.9 36.4,21.9 C15.1 37.2,23.38 37.2,23.9 38.4,25.1 L3.2 | 36.14,21.9 C16.2 35.12,22.22 34.76,21.86 U1.P$B5 | 36.14,21.9 36.64,21.4 v36.65,21.4
  Bottom 0.15: 38.77,18.77 38.77,18.48 v38.1,17.8
  Bottom 0.152: v36.65,21.4 37.5,21.4 37.8,21.1 37.8,19.75 38.77,18.77
DN
  Top 0.15: J4.A7 22.75,29.65 23,29.9 23.7,29.9 23.75,29.85 J4.B7 23.75,27.95 23.35,27.55 D3.1
DP
  Top 0.15: J4.A6 23.25,28.35 23,28.1 22.4,28.1 22.25,28.25 J4.B6 22.25,28.35 21.45,27.55 D3.3
EPD_3V3
  Top 0.3: L5.1 5.4,8.9 5.7,9.2 7.8,9.2 8.8,10.2 8.8,15 9.5,15.7 10.57,15.7 J1.16 J1.15 11.15,16.25 EPD_C5.2 11.7,17.2 11.9,17.4 13.3,17.4 13.7,17 C26.1 15.15,16.45 Q2.3
EPD_BUSY  (via drill 0.2)
  Top 0.15: J1.9 12.75,19.25 13.7,18.3 v17.3,18.3 | v28.4,13.6 31.18,16.38 U1.P$AD12
  Bottom 0.15: v17.3,18.3 17.3,17.6 17.4,17.5 21.3,17.5 25.5,13.3 28.1,13.3 v28.4,13.6
EPD_CS  (via drill 0.2)
  Top 0.15: J1.12 10.15,17.75 9.9,18 9.9,24.1 10.3,24.5 15.6,24.5 v18,26.9 | v27.6,26.5 27.2,26.9 v26,26.9
  Bottom 0.15: v18,26.9 v26,26.9 | v27.6,26.5 27.6,25.71 U1.P$K2
  other vias: 32.51,20.8
EPD_DC  (via drill 0.2)
  Top 0.15: J1.11 13.15,18.25 13.5,17.9 v17.8,17.9 | v27.8,14 27.9,14.1 28.35,14.1 30.98,16.73 U1.P$AD10
  Bottom 0.15: v17.8,17.9 21.3,17.9 25.6,13.6 27.6,13.6 27.8,13.8 v27.8,14
EPD_RST  (via drill 0.2)
  Top 0.15: v20.75,18.75 24.8,14.7 27.1,14.7 v27.2,14.8 | J1.10 v11.75,18.75
  Bottom 0.15: v11.75,18.75 v20.75,18.75 | v27.2,14.8 29.69,14.8 U1.P$AC11
  other vias: 31.8,16.91
GDR
  Top 0.3: J1.2 10.68,22.8 11.12,22.8 R2_EP_DR.2 11.53,23.62 11.85,23.95 Q1.1
GND  (via drill 0.2)  (94 unrouted)
  Top 0.23: C34.1 6.3,28.7 | C37.1 13.12,30.5
  Top 0.24: 13.34,28.87 C23.1 12.52,28.87 | C38.1 v14.1,33.4
  Top 0.26: IC9.C3 IC9.C2 IC9.C1 | 13.4,28.8 IC9.B1 | C30.1 v19.7,4.1 | C32.1 v6.3,25.6 | IC1.D2 11.6,32.2 | C31.1 31.12,4.48
  Top 0.3: U3.6 7.65,30.85 7.5,31 | 7.5,31 U3.9 7.4,31.7 7.25,31.85 U3.1 | U3.4 6.85,30.35 7.5,31 | IC9.C1 13.4,28.8 13.34,28.87 | U1.P$F23 36.65,18.08 U1.P$78 | C10.2 39.36,17.4 39.8,17.4 40.3,16.9 40.3,16.74 C3.2 | EPD_C8.1 EPD_C7.1 EPD_C6.1 EPD_C5.1 | J1.17 9.85,15.25 9.7,15.1 v9.7,14.6 | D4.1 v18.5,7.2 | R2_EP_DR.1 12.18,23.3 v12.7,23.3 | C33.2 13.05,25.15 v13,25.1 | J1.MP1 7.97,23.43 v8,23.4 | IC2.B3 6.6,27.2 6.2,26.8 v5.8,26.8 | IC2.B1 8,27.2 8.4,26.8 v8.9,26.8 | 12.52,28.87 C24.1 11.05,28.05 v10.8,27.8 | 6.3,28.7 v6.1,28.9 | R9.1 11.4,34.38 9.72,34.38 v9.7,34.4 | 11.6,32.2 v11.4,32.4 | 13.12,30.5 v13.6,30.5 | J2.5 31.8,8.95 v31.8,8.9 32.44,9.54 J2.3 | 31.12,4.48 v30.7,4.9 | SW_DN.1 35.4,3.8 v34.6,3 | C7.2 v29.4,13.5 | v29.4,13.5 | C21.2 27.16,16.04 v26.5,16.7 | C20.2 v25.3,18.6 | C6.2 v27,22.8 | v27,22.8 | C18.1 v29.8,25.5 | C17.1 31.3,27 v31.7,27 | C19.2 30.95,28.14 v31.2,27.9 | U1.P$B7 34.52,21.05 U1.P$75 | C16.1 36.18,23.28 v36.2,23.3 | C15.2 38.7,24.2 v39.3,24.2 | C8.2 33.84,13.25 v33.4,12.8 | EPD_C11.1 13.4,10 v13.4,9.7 | R3.2 29.12,28.77 v29.3,28.6 | IC3.8 IC3.9 29.95,31.55 v30.1,31.7 | R2_USB.2 19.8,27.82 J4.A12_B1 19.23,29.55 J4.SH4 | C11.2 40.45,18.1 v40.6,18.1 | EPD_C2.1 EPD_C1.1
  Route2 0.3: U1.P$74 U1.P$85
  other vias: 34.1,18.5 40.05,13.55 40.3,13.3 40.55,13.05 41.3,13.45 41.05,13.7 40.8,13.95 40.55,14.2
  pour Route2: -8.47,-8.32 50.27,-8.32 53.32,-5.27 53.32,35.22 -9.87,35.22 -11.42,33.67 -11.42,-5.37
  pour Bottom: 31.56,1.86 31.58,1.88 36.42,1.88 36.44,1.86 36.46,1.84 36.48,1.82 36.48,0.08 39,0.08 39.78,0.12 40.54,0.25 41.29,0.46 42,0.76 42.68,1.14 43.32,1.59 43.9,2.1 44.41,2.68 44.86,3.32 45.24,4 45.54,4.71 45.75,5.46 45.88,6.22 45.92,7 45.92,28 45.88,28.78 45.75,29.54 45.54,30.29 45.24,31 44.86,31.68 44.41,32.32 43.9,32.9 43.32,33.41 42.68,33.86 42,34.24 41.29,34.54 40.54,34.75 39.78,34.88 39,34.92 7.1,34.92 6.32,34.88 5.56,34.75 4.81,34.54 4.1,34.24 3.42,33.86 2.78,33.41 2.2,32.9 1.69,32.32 1.24,31.68 0.86,31 0.56,30.29 0.35,29.54 0.22,28.78 0.18,28 0.08,24.48 7.02,24.48 7.04,24.46 7.06,24.44 7.08,24.42 7.08,10.58 7.06,10.56 7.04,10.54 7.02,10.52 0.08,10.52 0.08,7 0.12,6.22 0.25,5.46 0.46,4.71 0.76,4 1.14,3.32 1.59,2.68 2.1,2.1 2.68,1.59 3.32,1.14 4,0.76 4.71,0.46 5.46,0.25 6.22,0.12 7,0.08 9.52,0.08 9.52,1.82 9.54,1.84 9.56,1.86 9.58,1.88 14.42,1.88 14.44,1.86 14.46,1.84 14.48,1.82 14.48,0.08 20.52,0.08 20.52,1.82 20.54,1.84 20.56,1.86 20.58,1.88 25.42,1.88 25.44,1.86 25.46,1.84 25.48,1.82 25.48,0.08 31.52,0.08 31.52,1.82 31.54,1.84
  pour Top: -5.57,-6.52 46.12,-6.52 46.12,30.67 42.07,34.72 -3.57,34.72 -5.92,32.37 -5.92,-6.17
HAPTIC_EN  (via drill 0.2)
  Top 0.15: IC2.A1 8.5,26 v9,26 | v24.7,25.7 25.13,25.7 U1.P$U1
  Bottom 0.15: v9,26 9.7,25.3 12.6,25.3 12.8,25.5 24.5,25.5 v24.7,25.7
IMU_INT1  (via drill 0.2)
  Top 0.15: IC3.5 31.45,29.75 31.7,29.5 31.7,27.8 31.3,27.4 v30.4,27.4 | v29.5,27.4 27.8,25.7 27.8,24.45 U1.P$N1
  Bottom 0.15: v30.4,27.4 v29.5,27.4
IMU_INT2  (via drill 0.2)
  Top 0.15: IC3.6 31.65,30.25 v31.7,30.2
  Bottom 0.15: v31.7,30.2 29.2,27.7 26.8,27.7 26.6,27.5 26.6,25.3 U1.P$P2
  other vias: 31.8,20.09
LX1
  Top 0.26: IC9.B2 IC9.B3 15.67,29
  Top 0.3: L7.1 15.67,29
LX2
  Top 0.26: IC9.D2 IC9.D3 15.4,28.2
  Top 0.3: L7.2 15.83,27.77 15.4,28.2
MOSI  (via drill 0.2)
  Top 0.152: J1.14 9.05,16.75 8.7,17.1 8.7,24.45 8.25,24.9 0.9,24.9 0.6,25.2 0.6,29.3 5.1,33.8 10.5,33.8 v10.6,33.9 | v37.9,21.6 37.4,21.1 v37.4,20.9
  Bottom 0.152: v10.6,33.9 10.8,34.1 17.3,34.1 17.8,33.6 17.8,32.8 18.2,32.4 30.95,32.4 32.6,30.75 32.6,29.2 32.7,29.1 39.6,29.1 40.3,28.4 40.3,24 v37.9,21.6 | v37.4,20.9 36.5,20.9 U1.P$B13
  other vias: 36.04,20.44
N$1
  Top 0.152: U1.P$A23 38.49,19 40.4,19 40.5,19.1 40.5,19.4 40.2,19.7 40.2,20 40.4,20.2 40.75,20.2 X1.3 41.42,20.62 C2.1
N$2
  Top 0.152: IC3.1 29.35,29.32 R3.1
N$3
  Top 0.152: C1.1 43.62,18.07 X1.1 42.58,17.98 41.95,17.35 40.65,17.35 39.95,18.05 38.44,18.05 U1.P$B24
N$4
  Top 0.152: U1.P$H23 36.75,17.25 36.95,17.25 L1.1 38.31,16.4 39.3,16.4 39.62,16.72 C3.1
N$5
  Top 0.15: R9.2 11.8,32.9 IC1.D1
N$6
  Top 0.152: L3.1 L2.2
N$7
  Top 0.152: L2.1 35.9,23.8 34.31,22.21 U1.P$B3
N$8
  Top 0.15: J1.4 11.55,21.75 EPD_C2.2
N$9
  Top 0.15: R4.1 13.38,28.18 IC9.D1
N$10
  Top 0.152: C13.1 38.8,20.4 37.77,20.4 U1.P$A18
N$11
  Top 0.15: C9.1 U1.P$N24
N$12
  Top 0.15: R2.1 12.68,27.07 IC9.E1
N$13
  Top 0.15: 14.75,13 14.82,13.07 C2-EP-DR.2
  Top 0.3: L5.2 5.4,2.1 5.8,1.7 8.1,1.7 8.6,2.2 8.6,5.4 9.9,6.7 19.7,6.7 20,7 20,11.9 18.55,13.35 | 18.55,13.35 17.9,14 15,14 14.8,13.8 14.8,13.1 14.82,13.07 | C2-EP-DR.2 14.75,13 D5.2 | 18.55,13.35 18.55,22.95 18.2,23.3 Q1.3
N$14
  Top 0.3: C2-EP-DR.1 16.15,12.2 D2.1 D4.2
N$15
  Top 0.15: J1.5 11.45,21.25 EPD_C1.2
N$16
  Top 0.15: C32.2 7.29,26.69 IC2.A2
N$17
  Top 0.15: R1_USB.2 24.25,27.88 J4.A5
N$21  (via drill 0.2)
  Top 0.152: C20.1 28.3,18.6 v28.6,18.3
  Bottom 0.152: v28.6,18.3 30.41,18.3 U1.P$AC5
  other vias: 30.74,17.97
N$25
  Top 0.15: R1_EP_DR.1 13.43,21.5 R_TYPE_SEL.2 14.04,21.39 SJ1.2
N$30
  Top 0.15: R2_USB.1 21.1,27.8 21.25,27.95 J4.B5
N$32
  Top 0.15: EPD_C6.2 11.35,15.5 11.3,15.5 11.2,15.4 11.2,15 10.95,14.75 J1.18
N$33
  Top 0.15: EPD_C7.2 11.15,14.25 J1.19
N$34
  Top 0.15: EPD_C12.2 10.6,11.72 J1.24
N$36
  Top 0.15: J1.22 11.05,12.75 11.9,11.9 EPD_C10.2
N$38
  Top 0.15: EPD_C8.2 11.55,13.75 J1.20
OUT+
  Top 0.15: TP_OP.TP 2.6,26.2 6.3,26.2 IC2.A3
OUT-
  Top 0.15: TP_ON.TP 6.6,27.9 IC2.C3
P0.00
  Top 0.15: U1.P$D2 33.38,22.05 33.25,22.05 33.05,22.25 33.05,22.5 32.3,23.25 32.3,23.4
  Top 0.152: 32.3,23.4 32.8,23.9 32.8,24.57 X2.1 31.76,25.38 C17.2
P0.01
  Top 0.152: U1.P$F2 33.22,21.68 32.8,22.1 32.4,22.1 32.3,22.2 32.3,22.8 32.2,22.9 31.8,22.9 31.5,22.6 31.23,22.6 X2.2 30.02,23.62 C18.2
P0.13
  Top 0.15: C29.2 9.88,3.69 R5.1 10.2,3.97 SW_UP.2 10.6,4.7 11.5,5.6 25.6,5.6 26.1,6.1 26.1,13.7 26.8,14.4 28.23,14.4 U1.P$AD8
P0.14  (via drill 0.2)
  Top 0.15: C30.2 20.73,3.54 R8.1 21.3,3.82 SW_ENT.2 21.6,4.5 22.3,5.2 26.2,5.2 27,6 v27,14 | v31.1,17.6 31.11,17.6 U1.P$AC9
  Bottom 0.15: v27,14 26.8,14.2 26.8,15 27,15.2 28.3,15.2 30.6,17.5 31,17.5 v31.1,17.6
P1.01  (via drill 0.2)
  Top 0.15: Q2.1 R_PWR_EPD.1 15.53,15.32 v15.7,15.5
  Bottom 0.15: v15.7,15.5 22.9,15.5 25.4,13 32.1,13 33.16,14.05 33.55,14.05 U1.P$Y23
  other vias: 34.63,15.14
P1.02  (via drill 0.2)
  Top 0.15: SW_DN.2 32.25,3.97 R7.1 31.88,3.84 C31.2 30.52,4.12 v30.5,4.1 | v38.1,4.8 38.1,12.03 U1.P$W24
  Bottom 0.15: v38.1,4.8 37.4,4.1 v30.5,4.1
PMIC_INT  (via drill 0.2)
  Top 0.15: IC1.A1 v13.3,33.4 | v18.2,27.8 18.2,27.3 v19,26.5
  Bottom 0.15: v13.3,33.4 18,28.7 18,27.9 18.1,27.8 v18.2,27.8 | v19,26.5 24.69,26.5 U1.P$T2
  other vias: 31.45,19.74
PREVGH
  Top 0.3: J1.21 11.45,13.25 EPD_C9.2 12.6,12.1 13.3,12.1 13.95,11.45 13.95,9.1 D5.1
PREVGL
  Top 0.3: J1.23 10.68,12.2 11.1,12.2 11.3,12 11.3,10.8 11.6,10.5 EPD_C11.2 13.6,8.8 13.6,8 14.2,7.4 15.8,7.4 16.6,8.2 D2.2
RESE
  Top 0.15: J1.3 11.05,22.25 11.25,22.45 12.85,22.45 Q1.2 13.4,22.3 R1_EP_DR.2
RESET  (via drill 0.2)
  Top 0.15: J2.6 31,8.27 | 31,8.27 30.84,8.27 30.3,8.8 29.3,8.8 29.1,9 29.1,11.6 30.9,13.4 v31.8,13.4 | TP_RESET.TP 29.9,6.6 31,7.7 31,8.27
  Bottom 0.15: v31.8,13.4 31.8,13.9 32.2,14.3 32.2,14.9 31.4,15.7 31.4,15.8 U1.P$AC13
  other vias: 32.16,16.56
RF
  Top 0.152: ANT1.1 42.1,12.1 L1.2 40.59,15.75 C4.1 C22.1
SCK  (via drill 0.2)
  Top 0.15: J1.13 9.15,17.25 9,17.4 9,24.6 8.4,25.2 1.1,25.2 1,25.3 1,29.1 5.3,33.4 10.4,33.4 v10.7,33.1 | v39.9,24.2 37.1,21.4 37.1,21.2 36.88,20.98 U1.P$A12
  Bottom 0.15: v10.7,33.1 11.4,33.8 16.9,33.8 17.3,33.4 17.3,32.3 18.3,31.3 31.49,31.3 32.2,30.59 32.2,29.1 32.6,28.7 39.2,28.7 39.3,28.7 39.5,28.7 39.9,28.3 v39.9,24.2
SCL  (via drill 0.2)
  Top 0.15: U3.7 9.32,31.35 R17.2 9.53,31.4 v10.1,31.4 | R4.2 12.38,27.4 8.3,27.4 8,27.7 IC2.C1 | IC1.B1 v12.9,34.5 13,34.6 17.3,34.6 17.8,34.1 17.8,33.1 18.4,32.5 26.1,32.5 28.35,30.25 | 28.35,30.25 28.9,29.7 29.38,29.7 IC3.12 | 28.35,30.25 28.35,27.95 27.7,27.3 v27.1,27.3
  Top 0.152: IC2.C1 8.8,27.7 TP_SCL.TP 9.9,29.6 10.7,30.4 10.7,30.8 v10.1,31.4
  Bottom 0.15: v10.1,31.4 10.1,34.2 10.5,34.6 12.8,34.6 v12.9,34.5 | v27.1,27.3 27.1,25.5 U1.P$M2
  other vias: 32.16,20.44
SDA  (via drill 0.2)
  Top 0.15: 29.95,28.65 29.95,27.05 28.15,25.25 28.15,24.65 31.82,20.98 U1.P$L1 | v12.6,30.1 12.6,30.4 12.12,30.88 R18.2 11.43,30.88 10.45,31.85 U3.8 8.04,32.2 v7.7,32.2 | v12.6,25.9 R2.2 | v28.8,28.1 29.4,28.1 29.95,28.65 | 29.95,28.65 IC3.2 | IC1.C1 v12.5,33.3 | TP_SDA.TP 2.25,28.45 v3.1,27.6
  Bottom 0.15: v28.8,28.1 26.8,28.1 26,27.3 17.7,27.3 16.3,25.9 v12.6,25.9 12.6,26 12.6,26.2 v12.6,30.1 12.6,33.2 v12.5,33.3 | v3.1,27.6 3.5,27.2 IC2.B2 7.3,31.8 v7.7,32.2
  other vias: 7.3,27.2
SWDCLK
  Top 0.15: J2.4 33.15,7.6 34,7.6 34.3,7.9 36.3,7.9 | 36.3,7.9 36.6,8.2 36.6,12.8 34.81,14.59 U1.P$AA24 | 40.5,2 40.2,1.7 TP_SWDCLK.TP 36.6,5.2 36.6,7.6 36.3,7.9
SWDIO  (via drill 0.2)
  Top 0.15: J2.2 33.75,8.56 33.1,9.22 33.1,9.9 33.5,10.3 33.5,12.1 34.3,12.9 34.6,12.9 34.7,13 34.7,14.01 U1.P$AC24 | TP_SWDIO.TP 37.8,3.3 v36.15,4.95
  Bottom 0.15: v36.15,4.95 36,4.8 34,4.8 33.5,5.3 33.5,8.01 J2.2
  other vias: 33.75,8.27
SWO
  Top 0.15: TP_SWO.TP 27.3,3.4 28.8,4.9 28.8,11.7 30.9,13.8 32.58,13.8 U1.P$AD22
VBAT
  Top 0.254: 12.62,31.09 C37.2
  Top 0.26: 4.29,30.69 C27.2 5.46,30.85 | 12.5,31.6 IC1.C2
  Top 0.3: TP_VBAT.TP 4.29,30.69 | 5.46,30.85 U3.3 U3.2 5.45,31.35 5.2,31.6 5.2,32.5 5.5,32.8 10.1,32.8 11.5,31.4 12.3,31.4 | 12.5,31.6 12.3,31.4 | 12.3,31.4 12.62,31.09
VBUS
  Top 0.24: 13.98,32.2 C38.2 14.59,32.31
  Top 0.26: 25.52,28.86 C42.1 25.52,27.31
  Top 0.28: IC1.A2 13.98,32.2
  Top 0.3: U1.P$AD2 29.35,18.15 C21.1 27.72,17.4 24,17.4 23.2,18.2 23.2,23 22.9,23.3 C43.1 D3.5 22.4,25.3 22.6,25.5 23.7,25.5 25.52,27.31 | 25.52,28.86 J4.A4_B9 25.4,29.5 24.2,30.7 21.3,30.7 | J4.A9_B4 20.6,29.5 20.9,29.8 20.9,30.3 21.3,30.7 | 21.3,30.7 19.9,32.1 18.3,32.1 17.4,33 17.4,33.6 16.79,34.22 15.32,34.22 14.7,33.6 14.7,32.4 14.6,32.3 14.59,32.31
VREG
  Top 0.24: 12.63,29.35 C23.2 12.91,29.4 IC9.A1
  Top 0.26: IC1.B2 12.9,31.8 | 14.95,30.25 14.1,29.4 IC9.A2 | IC9.A1 IC9.A2 | IC9.A2 IC9.A3
  Top 0.28: 12.9,31.8 13.5,31.2
  Top 0.3: 13.5,31.2 C39.1 | C39.1 14.95,30.25 | 11.65,29.3 C24.2 12.63,29.35 | C39.1 14.95,31.85 TP_VREG.TP
(copper drawn outside any net)
  shapes: Bottom area x2, Route15 area x1, Route2 area x1, Top area x1

## Text on the board
tPlace: VENTURES